# Altium PCB PCB1.PcbDoc
Units mil, origin at the board's own origin, x right, y up, seen from the top; angles counter-clockwise.
Board outline 2705 x 3275 mil, 2 copper layers (Top Layer, Bottom Layer); 22 components, 16 nets, 140 pads, 0 vias.
Unrouted connection lines stored in the file: 3.
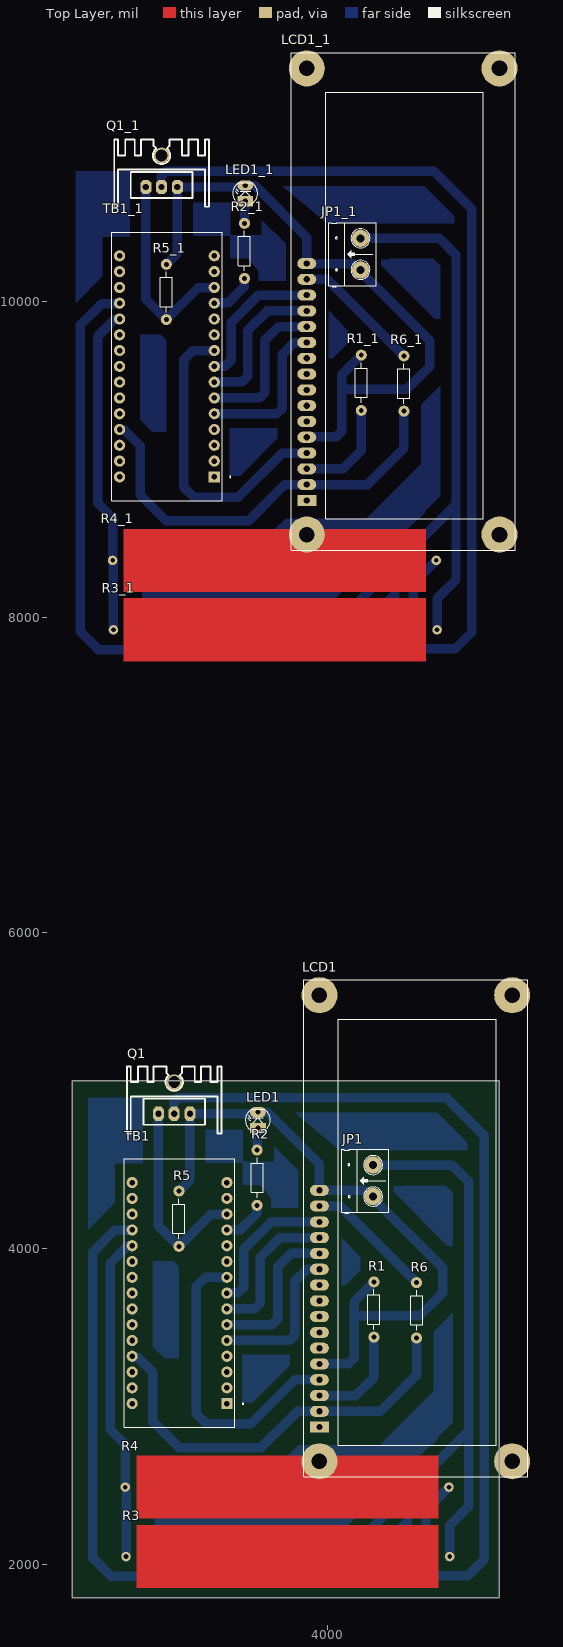
[diagram p0: Top Layer view]
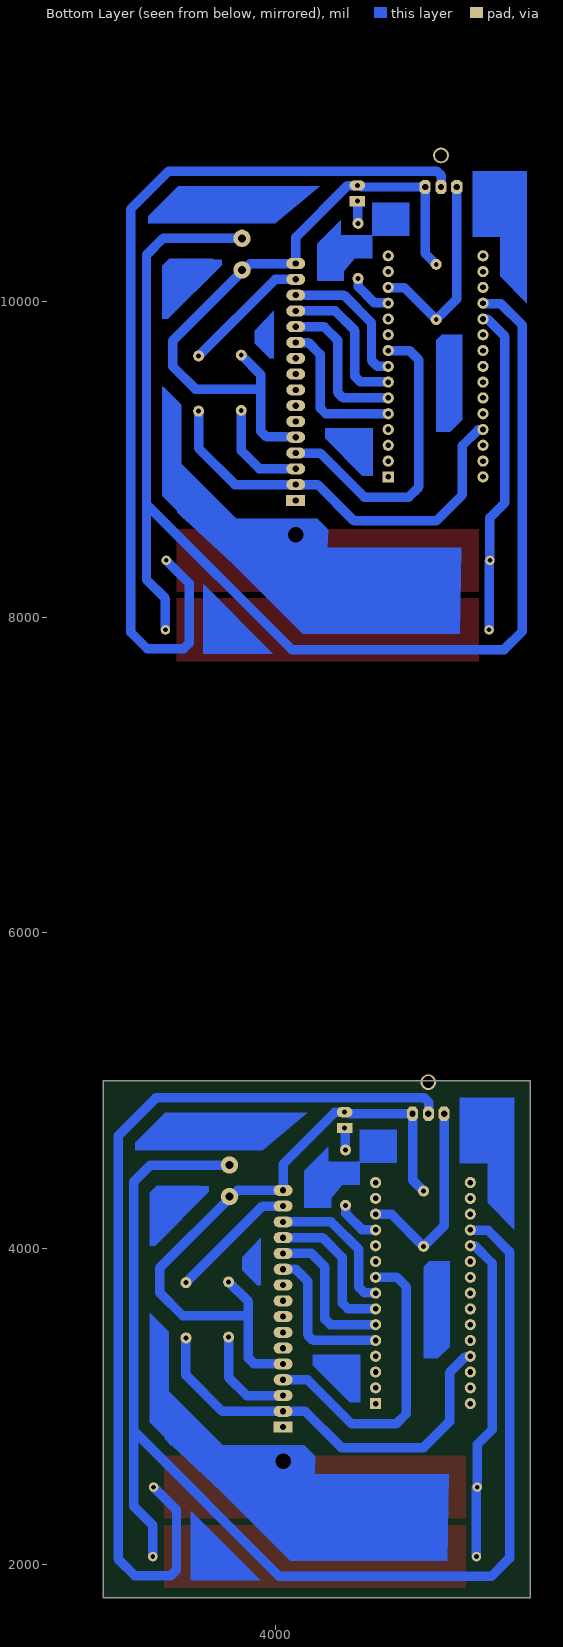
[diagram p1: Bottom Layer view, seen from below]

## Layer stack, top to bottom
Top Solder: solder mask 0.4, Solder Resist, Dk 3.5
Top Layer: signal copper 1.4
Dielectric 1: dielectric 12.6, FR-4, Dk 4.8
Bottom Layer: signal copper 1.4
Bottom Solder: solder mask 0.4, Solder Resist, Dk 3.5

## Board outline
2385,1790 5090,1790 5090,5065 2385,5065

## Design rules (kind name [scope] priority, off if disabled: settings)
Clearance [All] p1: gap=25 ignorepadtopadclearanceinfootprint=FALSE
PolygonConnect [All] p1: connectstyle=Relief reliefconductorwidth=10 reliefentries=4 polygonreliefangle="90 Angle" airgapwidth=10
RoutingLayers [All] p1: top layer_v5=FALSE bottom layer_v5=TRUE
RoutingVias [All] p1: holewidth=28 width=75 viastyle="Through Hole" minholewidth=28 minwidth=75 maxholewidth=28 maxwidth=75
SolderMaskExpansion [All] p1: expansion=4 istentingtop=FALSE
Width [All] p1: maxlimit=60 minlimit=60 preferedwidth=60
29 further rules are at their usual default settings.

## Classes and differential pairs
component class Sheet1: JP1 LCD1 LED1 Q1 R1 R2 R3 R4 R5 R6 TB1

## Components (designator, comment, footprint, x,y, rotation, side; value= is the part's Value field where it differs from the comment)
JP1 "Header 2_1" HED2 4290,4330 r90 top value="Header 2"
JP1_1 "Header 2_1" HED2 4210,10200 r90 top value="Header 2" (schematic designator JP1)
LCD1 "LCD16x2A" LCD16X2 3950,2870 r90 top
LCD1_1 "LCD16x2A" LCD16X2 3870,8740 r90 top (schematic designator LCD1)
LED1 "LED" LED-3 3560,4765 r90 top value="LED 3 ly Single Colour"
LED1_1 "LED" LED-3 3480,10635 r90 top value="LED 3 ly Single Colour" (schematic designator LED1)
Q1 "IRFZ44" QTO-220H3 2930,4855 r0 top
Q1_1 "IRFZ44" QTO-220H3 2850,10725 r0 top (schematic designator Q1)
R1 "Res1" R1/4W 4295,3790 r270 top value=100R
R1_1 "Res1" R1/4W 4215,9660 r270 top value=100R (schematic designator R1)
R2 "Res1" R1/4W 3555,4625 r270 top value=330R
R2_1 "Res1" R1/4W 3475,10495 r270 top value=330R (schematic designator R2)
R3 "ceramic res 10w" "ceramic res 10w" 4775,2050 r180 top
R3_1 "ceramic res 10w" "ceramic res 10w" 4695,7920 r180 top (schematic designator R3)
R4 "ceramic res 10w" "ceramic res 10w" 2720,2490 r0 top
R4_1 "ceramic res 10w" "ceramic res 10w" 2640,8360 r0 top (schematic designator R4)
R5 "Res1" R1/4W 3060,4365 r270 top value=10K
R5_1 "Res1" R1/4W 2980,10235 r270 top value=10K (schematic designator R5)
R6 "Res1" R1/4W 4565,3435 r90 top value=330R
R6_1 "Res1" R1/4W 4485,9305 r90 top value=330R (schematic designator R6)
TB1 "ARDUINO_NANO" SHIELD_ARDUINO_NANO 3063.96,3718.96 r180 top
TB1_1 "ARDUINO_NANO" SHIELD_ARDUINO_NANO 2983.96,9588.96 r180 top (schematic designator TB1)

## Footprints (in the part's own frame and the unit in brackets; to place one, negate y for a bottom-side part, rotate by r counter-clockwise, add the part's x,y. Pads: shape width x height; smd on the part's side, far side on the other; paste and mask are expansions set on the pad)
"ceramic res 10w" [mil]
  round 60 hole 30: 1(0,0) 2(2050,0)
  Top Layer region: 70,-200.35 1985,-200.35 1985,199.65 70,199.65
HED2 [mil] "Header 2, 2 pin, hight 300mil, Pin to Pin 200, Colour Green"
  round 110 hole 50: 1(0,0) 2(200,0)
  silkscreen extent -106,-100 300,200, body extent -92,-140 302,155, height 394
LCD16X2 [mm] "LCD dipslay 16x2, 16 pin"
  rect 1.778x3.048 hole 1: 1(0,0)
  oval 1.778x3.048 hole 1: 2(2.54,0) 3(5.08,0) 4(7.62,0) 5(10.16,0) 6(12.7,0) 7(15.24,0) 8(17.78,0) 9(20.32,0) 10(22.86,0) 11(25.4,0) 12(27.94,0) 13(30.48,0) 14(33.02,0) 15(35.56,0) 16(38.1,0)
  round 5.8 / inner round 0 / far side round 0 hole 2.5 unplated: M1(-5.5,0) M2(69.5,0) M3(-5.5,-31) M4(69.5,-31)
  silkscreen extent -8,-33.5 72,2.5, body extent -8.13,-34.47 72.37,2.03, height 18.14
LED-3 [mil] "LED 2 PIN, 3ly Only colour"
  rect 65x100 hole 32: 1(0,0)
  oval 65x100 hole 32: 2(100,0)
  silkscreen extent -29,-78 118,79, body extent -25,-75 113,75, height 217
QTO-220H3 [mil] "TO-220 1-2-3"
  oct 70x90 hole 40: 1(0,0) 2(100,0) 3(200,0)
  round 100 hole 75: 2(100,200)
  silkscreen extent -200,-125 400,300, body extent -190,-102 392,323, height 984
R1/4W [mil] "R 1/4W, 2 Pin, 350mil"
  round 70 hole 31: 1(0,0) 2(350,0)
  silkscreen extent 48,-38 302,38, body extent -40,-47 386,47, height 111
SHIELD_ARDUINO_NANO [mm]
  rect 1.8x1.8 / inner round 1.8 / far side rect 1.8x1.8 hole 0.9: 1(-7.62,17.78)
  round 1.8 hole 0.9: 2(-7.62,15.24) 3(-7.62,12.7) 4(-7.62,10.16) 5(-7.62,7.62) 6(-7.62,5.08) 7(-7.62,2.54) 8(-7.62,0) 9(-7.62,-2.54) 10(-7.62,-5.08) 11(-7.62,-7.62) 12(-7.62,-10.16) 13(-7.62,-12.7) 14(-7.62,-15.24) 15(-7.62,-17.78) 16(7.62,-17.78) 17(7.62,-15.24) 18(7.62,-12.7) 19(7.62,-10.16) 20(7.62,-7.62) 21(7.62,-5.08) 22(7.62,-2.54) 23(7.62,0) 24(7.62,2.54) 25(7.62,5.08) 26(7.62,7.62) 27(7.62,10.16) 28(7.62,12.7) 29(7.62,15.24) 30(7.62,17.78)
  silkscreen extent -10.3,-21.59 8.89,21.59, body extent -9,-21.6 9,23.4, height 12.6

## Part data
JP1 JP1_1: "Header, 2-Pin", Manufacturer="Generic Components", Class=Connector
LCD1 LCD1_1: library part LCD16x2, "LCD dipslay 16 char, 2 line"
LED1 LED1_1: "LED Single colour Green and Red"
Q1 Q1_1: "HEXFET N-Channel Power MOSFET"
R1 R1_1 R2 R2_1 R5 R5_1 R6 R6_1: library part Res1_1, "Resistor", Manufacturer="Generic Components", Class=Passive, Published=08/06/2000, Publisher="Altium Hobart Technology Centre", SubClass=Resistor
TB1 TB1_1: "Small, complete, and breadboard-friendly board based on the ATmega328 (Arduino Nano 3.x)", Package="Non-Standard Arduino", Availability="Not in stock", Check_prices=https://www.snapeda.com/parts/Arduino%20Nano/Arduino/view-part/?ref=eda, MF=Arduino, MP="Arduino Nano", Price=None, SnapEDA_Link=https://www.snapeda.com/parts/Arduino%20Nano/Arduino/view-part/?ref=snap

## Nets (pads, with @x,y where several pads share a name; then routed paths per layer and width w, separated by ;. In a path a pad name is that pad's centre, name@x,y a point inside that pad or via, vN(x,y) a via of type N, cw(c..) or ccw(c..) an arc to the next point about the centre after c; other vN are vias at no path point)
GND: JP1.1 LCD1.1 LCD1.5 LCD1.16 LED1.2 Q1.3 R1.1 R5.1 | length 4183.9
  Bottom Layer w60: R5.1 3130,4435 Q1.3 3531.15,4855 3541.15,4865 LED1.2 3560.96,4864.04 3621.24,4864.04 3950,4535.28 LCD1.16 4236.47,4370 4276.47,4330 JP1.1 4290,4320 4730,3880 4730,3720 4585,3575 4170,3575 ; LCD1.5 3951.91,3271.91 4134.85,3271.91 4170,3307.06 4170,3575 ; R1.1 4170,3665 4170,3575
NetJP1_2: JP1.2 R3.1 TB1.19 | length 8128.4
  Bottom Layer w60: TB1.19 2761.88,4116.88 2651.88,4116.88 2515,3980 2515,2040 2630,1925 3975,1925 4895,2845 ; JP1.2 4790,4530 4895,4425 4895,2845 ; R3.1 4775,2247.6 4895,2367.6 4895,2845
NetLCD1_2: LCD1.2 R6.1 TB1.27 | length 2651.2
  Bottom Layer w60: TB1.27 2766.04,3316.88 2793.93,3316.88 2895,3215.81 2895,2905 3060,2740 3580,2740 3810,2970 LCD1.2 4335,2970 4565,3200 R6.1 R6.1@4563.09,3433.09
NetLCD1_3: LCD1.3 R1.2 | length 650.3
  Bottom Layer w60: LCD1.3@3951.91,3071.91 LCD1.3 4180,3070 4295,3185 R1.2
NetLCD1_4: LCD1.4 TB1.9 | length 1946.3
  Bottom Layer w60: TB1.9 3228.96,3818.96 3170,3760 3170,2955 3235,2890 3515,2890 3795,3170 LCD1.4
NetLCD1_6: LCD1.6 TB1.11
NetLCD1_11: LCD1.11 TB1.5 | length 972.6
  Bottom Layer w60: TB1.5 3759.85,3418.96 3795,3454.11 3795,3795 3869.11,3869.11 3949.11,3869.11 LCD1.11
NetLCD1_12: LCD1.12 TB1.6 | length 966.7
  Bottom Layer w60: TB1.6 3649.85,3518.96 3685,3554.11 3685,3885 3770,3970 LCD1.12
NetLCD1_13: LCD1.13 TB1.7 | length 942.7
  Bottom Layer w60: TB1.7 3365,3620 3539.85,3620 3575,3655.15 3575,3945.06 3699.94,4070 LCD1.13
NetLCD1_14: LCD1.14 TB1.8 | length 912.8
  Bottom Layer w60: TB1.8 3366.04,3721.04 3434.85,3721.04 3470,3756.19 3470,3995 3645,4170 LCD1.14
NetLCD1_15: LCD1.15 R6.2 | length 815.9
  Bottom Layer w60: LCD1.15 4080,4270 R6.2
NetLED1_1: LED1.1 R2.1 | length 142.4
  Bottom Layer w60: R2.1 3556.91,4626.91 3556.91,4762.5 3559.41,4765 LED1.1
NetQ1_1: Q1.1 R5.2 TB1.13 | length 1282.3
  Bottom Layer w60: Q1.1 2930,4145 R5.2 3261.88,4216.88 3361.88,4216.88 TB1.13
NetQ1_2: Q1.2 R4.2 | length 5844.7
  Bottom Layer w60: Q1.2@3030,4855 3027.46,4857.54 3027.46,4927.32 3055.15,4955 4755,4955 4995,4715 4995,2035 4890,1930 4660.15,1930 4625,1965.15 4625,2345 R4.2
NetR2_2: R2.2 TB1.12 | length 285
  Bottom Layer w60: TB1.12 3366.04,4121.04 3451.04,4121.04 3553.09,4223.09 3553.09,4273.09 R2.2
NetR3_2: R3.2 R4.1 TB1.20 | length 2085.7
  Bottom Layer w60: R3.2 2725,2485 R4.1 2720,2760 2625,2855 2625,3907.89 2735.03,4017.92 2762.92,4017.92 TB1.20@2765,4020
pads on no net: JP1_1.1 JP1_1.2 LCD1.7 LCD1.8 LCD1.9 LCD1.10 LCD1.M1 LCD1.M2 LCD1.M3 LCD1.M4 LCD1_1.1 LCD1_1.2 LCD1_1.3 LCD1_1.4 LCD1_1.5 LCD1_1.6 LCD1_1.7 LCD1_1.8 LCD1_1.9 LCD1_1.10 LCD1_1.11 LCD1_1.12 LCD1_1.13 LCD1_1.14 LCD1_1.15 LCD1_1.16 LCD1_1.M1 LCD1_1.M2 LCD1_1.M3 LCD1_1.M4 LED1_1.1 LED1_1.2 Q1_1.1 Q1_1.2 Q1_1.3 R1_1.1 R1_1.2 R2_1.1 R2_1.2 R3_1.1 R3_1.2 R4_1.1 R4_1.2 R5_1.1 R5_1.2 R6_1.1 R6_1.2 TB1.1 TB1.2 TB1.3 TB1.4 TB1.10 TB1.14 TB1.15 TB1.16 TB1.17 TB1.18 TB1.21 TB1.22 TB1.23 TB1.24 TB1.25 TB1.26 TB1.28 TB1.29 TB1.30 TB1_1.1 TB1_1.2 TB1_1.3 TB1_1.4 TB1_1.5 TB1_1.6 TB1_1.7 TB1_1.8 TB1_1.9 TB1_1.10 TB1_1.11 TB1_1.12 TB1_1.13 TB1_1.14 TB1_1.15 TB1_1.16 TB1_1.17 TB1_1.18 TB1_1.19 TB1_1.20 TB1_1.21 TB1_1.22 TB1_1.23 TB1_1.24 TB1_1.25 TB1_1.26 TB1_1.27 TB1_1.28 TB1_1.29 TB1_1.30
copper on no net: | length 31810.9
  Bottom Layer w60: 2645,7920 2645,8355 2640,8360 2640,8630 2545,8725 2545,9777.89 2655.03,9887.92 2682.92,9887.92 2685,9890 ; 2683.96,9188.96 2686.04,9186.88 2713.93,9186.88 2815,9085.81 2815,8775 2980,8610 3500,8610 3730,8840 3869.98,8840 4255,8840 4485,9070 4485,9305 4483.09,9303.09 ; 2683.96,9988.96 2681.88,9986.88 2571.88,9986.88 2435,9850 2435,7910 2550,7795 3895,7795 4815,8715 ; 2850,10725 2850,10015 2980,9885 3181.88,10086.88 3281.88,10086.88 3283.96,10088.96 ; 2950,10725 2947.46,10727.54 2947.46,10797.32 2975.15,10825 4675,10825 4915,10585 4915,7905 4810,7800 4580.15,7800 4545,7835.15 4545,8215 4690,8360 ; 2980,10235 3050,10305 3050,10725 3451.15,10725 3461.15,10735 3480,10735 3480.96,10734.04 3541.24,10734.04 3870,10405.28 3870,10240 4156.47,10240 4196.47,10200 4210,10200 4210,10190 4650,9750 4650,9590 4505,9445 4090,9445 ; 3283.96,9288.96 3679.85,9288.96 3715,9324.11 3715,9665 3789.11,9739.11 3869.11,9739.11 3870,9740 ; 3283.96,9388.96 3569.85,9388.96 3605,9424.11 3605,9755 3690,9840 3870,9840 ; 3283.96,9488.96 3285,9490 3459.85,9490 3495,9525.15 3495,9815.06 3619.94,9940 3870,9940 ; 3283.96,9588.96 3286.04,9591.04 3354.85,9591.04 3390,9626.19 3390,9865 3565,10040 3870,10040 ; 3283.96,9688.96 3148.96,9688.96 3090,9630 3090,8825 3155,8760 3435,8760 3715,9040 3870,9040 ; 3283.96,9988.96 3286.04,9991.04 3371.04,9991.04 3473.09,10093.09 3473.09,10143.09 3475,10145 ; 3475,10495 3476.91,10496.91 3476.91,10632.5 3479.41,10635 3480,10635 ; 3870,9140 3871.91,9141.91 4054.85,9141.91 4090,9177.06 4090,9445 ; 3870,10140 4000,10140 4485,9655 ; 3871.91,8941.91 3870,8940 4100,8940 4215,9055 4215,9310 ; 4210,10400 4710,10400 4815,10295 4815,8715 ; 4215,9660 4090,9535 4090,9445 ; 4695,7920 4695,8117.6 4815,8237.6 4815,8715

## Other copper
Bottom Layer:
  region: 4615,8990 4162.41,8537.41 4620.69,8665.5
  region: 2815,9790 2815,9250 2890,9175 2980,9175 2980,9755 2945,9790
  region: 3716.82,10730 4615,10730 4805,10540 4805,10495 3999,10495
  region: 4390,10265 4395,10270 4670,10270 4715,10225 4715,9890 4680,9890 4340,10230 4340,10265
  region: 4715,9460 4710,9460 4595,9345 4595,9215 4715,9215
  region: 2405,9990 2575,10160 2575,10825 2405,10825
  region: 2830,7895 3825,7895 4265,8335 4160,8440 2820,8440
  region: 3665,8555 3735,8625 4575,8625 4265,8335 4160,8440 3670.48,8440
  region: 4575,8625 4580.19,8625 4620.69,8665.5 4601.2,8685 4480,8685 4480,8635 4440,8595
  region: 4620,8675 4715,8770 4715,9215 4595,9215 4595,8865
  region: 3382.5,8897.5 3447.5,8897.5 3682.5,9132.5 3682.5,9197.5 3382.5,9197.5
  region: 4015,7770 4450,8205 4455,8205 4455,7770
  region: 4010,9940 4010,9640 4035,9640 4130,9735 4130,9815
  region: 2575,10410 2750,10410 2750,10825 2575,10825
  region: 3150.32,10624.63 3385.32,10624.63 3385.32,10414.63 3150.32,10414.63
  region: 3735,10145 3735,10150 3735,10365 3585,10515 3585,10420 3385,10420 3385,10275 3495,10275 3565,10190 3565,10185 3565,10130 3735,10130
  region: 3815,4275 3815,4280 3815,4495 3665,4645 3665,4550 3465,4550 3465,4405 3575,4405 3645,4320 3645,4315 3645,4260 3815,4260
  region: 3230.32,4754.63 3465.32,4754.63 3465.32,4544.63 3230.32,4544.63
  region: 2655,4540 2830,4540 2830,4955 2655,4955
  region: 4090,4070 4090,3770 4115,3770 4210,3865 4210,3945
  region: 4095,1900 4530,2335 4535,2335 4535,1900
  region: 3462.5,3027.5 3527.5,3027.5 3762.5,3262.5 3762.5,3327.5 3462.5,3327.5
  region: 4700,2805 4795,2900 4795,3345 4675,3345 4675,2995
  region: 4655,2755 4660.19,2755 4700.69,2795.5 4681.2,2815 4560,2815 4560,2765 4520,2725
  region: 3745,2685 3815,2755 4655,2755 4345,2465 4240,2570 3750.48,2570
  region: 2910,2025 3905,2025 4345,2465 4240,2570 2900,2570
  region: 2485,4120 2655,4290 2655,4955 2485,4955
  region: 4795,3590 4790,3590 4675,3475 4675,3345 4795,3345
  region: 4470,4395 4475,4400 4750,4400 4795,4355 4795,4020 4760,4020 4420,4360 4420,4395
  region: 3796.82,4860 4695,4860 4885,4670 4885,4625 4079,4625
  region: 2895,3920 2895,3380 2970,3305 3060,3305 3060,3885 3025,3920
  region: 4695,3120 4242.41,2667.41 4700.69,2795.5